# EAGLE board BufferSaver-Panel (EAGLE 9.0.1)
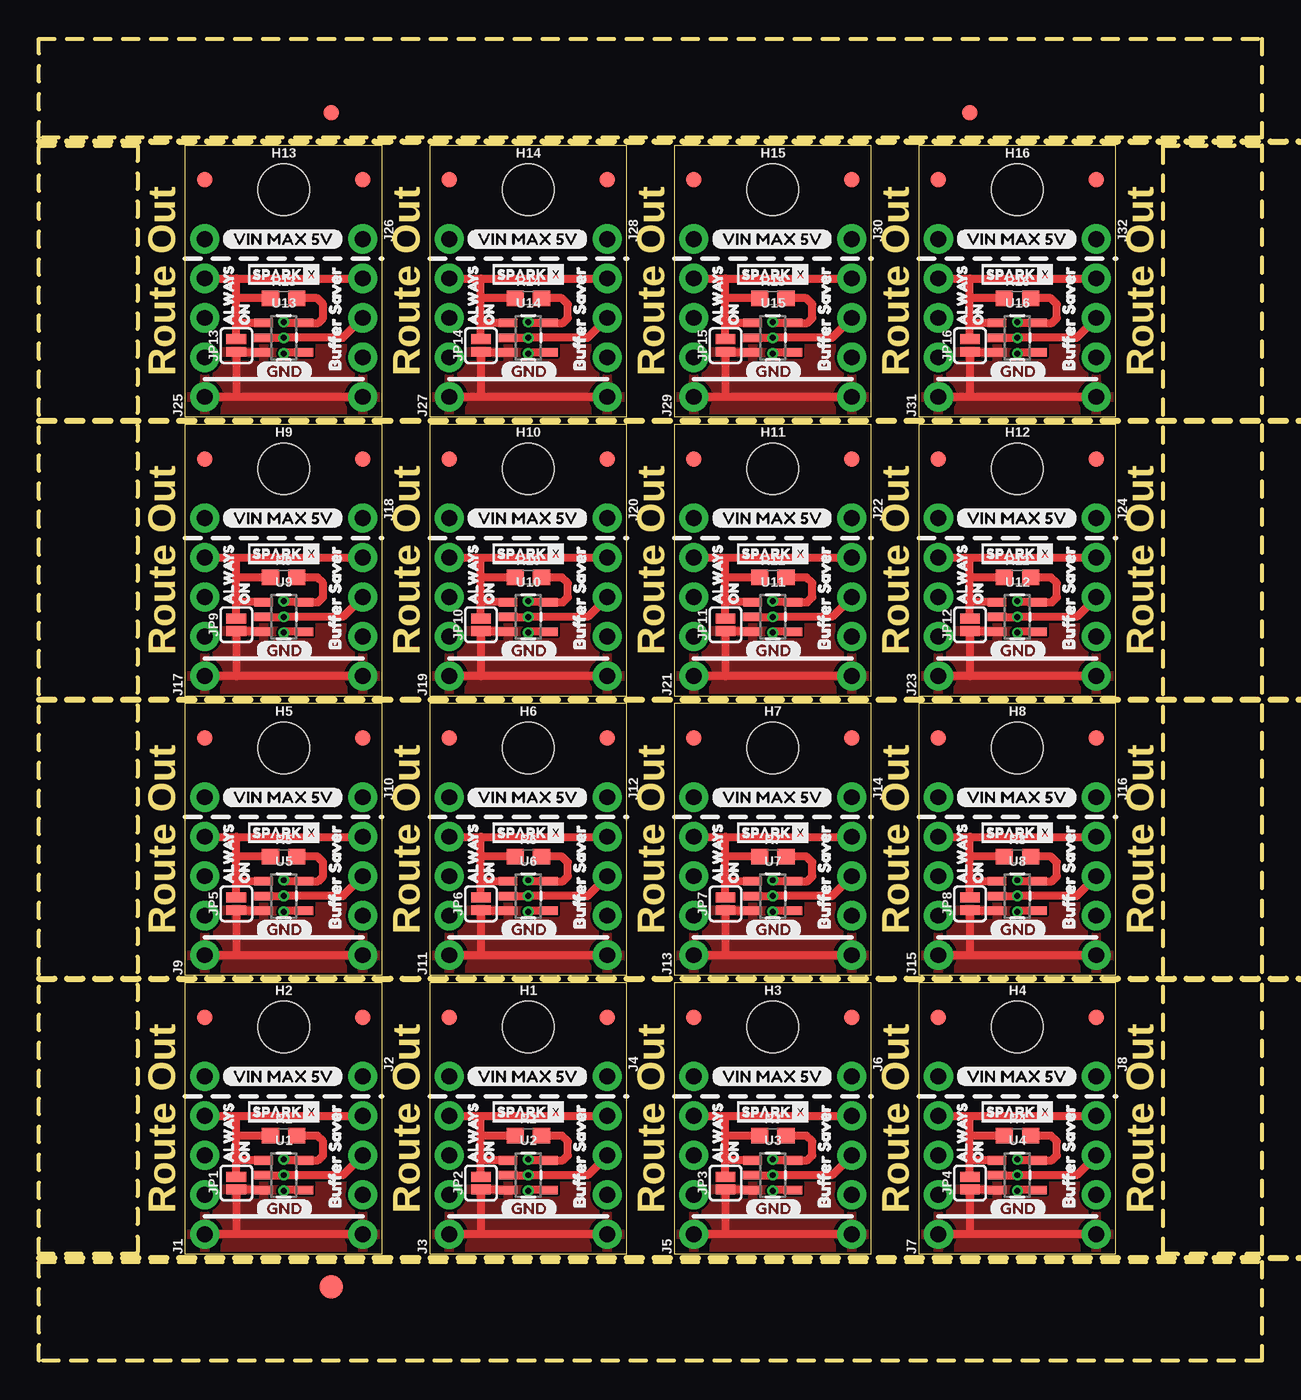
[diagram p0: board, top side]
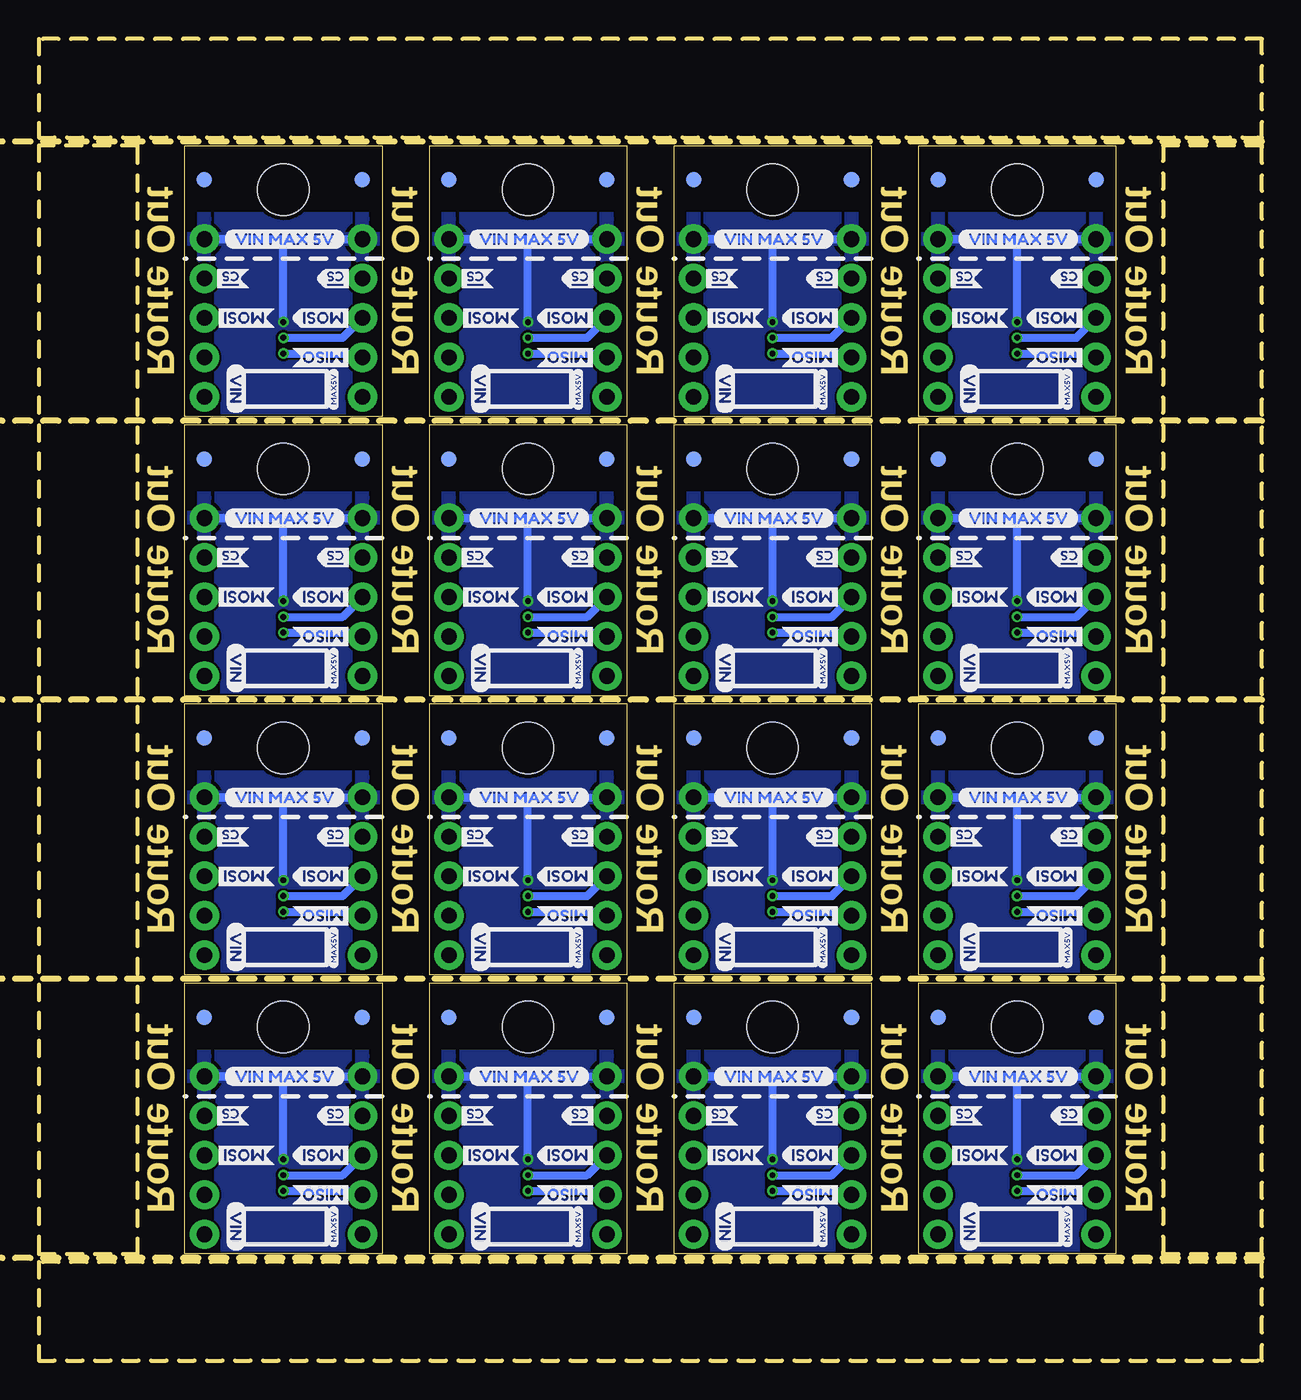
[diagram p1: board, bottom side, seen from below]

Size 78.66 x 85.04 mm. Coordinates in mm from the lower left corner, seen from the top.
Outline: 9.4,6.86 22.08,6.86 22.08,24.31 9.4,24.31 9.4,6.86
Outline: 25.13,6.86 37.81,6.86 37.81,24.31 25.13,24.31 25.13,6.86
Outline: 40.85,6.86 53.53,6.86 53.53,24.31 40.85,24.31 40.85,6.86
Outline: 56.58,6.86 69.26,6.86 69.26,24.31 56.58,24.31 56.58,6.86
Outline: 9.4,24.82 22.08,24.82 22.08,42.27 9.4,42.27 9.4,24.82
Outline: 25.13,24.82 37.81,24.82 37.81,42.27 25.13,42.27 25.13,24.82
Outline: 40.85,24.82 53.53,24.82 53.53,42.27 40.85,42.27 40.85,24.82
Outline: 56.58,24.82 69.26,24.82 69.26,42.27 56.58,42.27 56.58,24.82
Outline: 9.4,42.77 22.08,42.77 22.08,60.22 9.4,60.22 9.4,42.77
Outline: 25.13,42.77 37.81,42.77 37.81,60.22 25.13,60.22 25.13,42.77
Outline: 40.85,42.77 53.53,42.77 53.53,60.22 40.85,60.22 40.85,42.77
Outline: 56.58,42.77 69.26,42.77 69.26,60.22 56.58,60.22 56.58,42.77
Outline: 9.4,60.73 22.08,60.73 22.08,78.18 9.4,78.18 9.4,60.73
Outline: 25.13,60.73 37.81,60.73 37.81,78.18 25.13,78.18 25.13,60.73
Outline: 40.85,60.73 53.53,60.73 53.53,78.18 40.85,78.18 40.85,60.73
Outline: 56.58,60.73 69.26,60.73 69.26,78.18 56.58,78.18 56.58,60.73
Outline: 0,6.35 78.66,6.35 78.66,0 0,0 0,6.35
Outline: 72.31,78.18 78.66,78.18 78.66,6.86 72.31,6.86 72.31,78.18
Outline: 0,85.04 78.66,85.04 78.66,78.69 0,78.69 0,85.04
Outline: 0,78.18 6.35,78.18 6.35,6.86 0,6.86 0,78.18
Copper layers (1*16): Top 0.035mm / dielectric 1.5mm / Bottom 0.035mm
Design rules "SparkFun-2-layer-PCBWay-LIMIT": minimum track width 6mil, minimum drill 0.3mm, track to track 6mil, track to pad 6mil, pad to pad 6mil, via to via 6mil, smd to smd 6mil, copper to edge 6mil, drill to drill 6mil, minimum pad ring 6mil, minimum via ring 6mil, stop-mask expansion 4mil, vias tented up to drill 25mil, thermal gap 10mil
Milling: 240 lines

## Footprints (pad centres in the part's own frame; a part is rotated, then mirrored left to right if it is on the bottom)
FIDUCIAL-1X2 = smd 1 x 1: 1 0,0
FIDUCIAL-1.5X3 = smd 1.5 x 1.5: 1 0,0
STAND-OFF = hole 3.302: 0,0
1X05_NO_SILK = drill 1.016 pad 1.88: 1 0,0; 2 2.54,0; 3 5.08,0; 4 7.62,0; 5 10.16,0
SMT-JUMPER_2_NO_SILK = smd 0.635 x 1.27: 1 -0.406,0; 2 0.406,0
0603 = smd 1.1 x 1: 1 -0.85,0; 2 0.85,0
SOT23-5 = smd 0.55 x 1.2: 1 -0.95,-1.3; 2 0,-1.3; 3 0.95,-1.3; 4 0.95,1.3; 5 -0.95,1.3

## Placement (x,y rotation side)
E$1  [FIDUCIAL-1X2]  18.8,80.28 0 top
E$2  [FIDUCIAL-1X2]  59.86,80.28 0 top
E$3  [FIDUCIAL-1.5X3]  18.8,4.76 0 top
FD1  FIDUCIAL1X2  [FIDUCIAL-1X2]  10.67,22.1 0 top
FD2  FIDUCIAL1X2  [FIDUCIAL-1X2]  20.83,22.1 0 top
FD3  FIDUCIAL1X2  [FIDUCIAL-1X2]  10.67,22.1 0 bottom
FD4  FIDUCIAL1X2  [FIDUCIAL-1X2]  20.83,22.1 0 bottom
FD5  FIDUCIAL1X2  [FIDUCIAL-1X2]  26.4,22.1 0 top
FD6  FIDUCIAL1X2  [FIDUCIAL-1X2]  36.56,22.1 0 top
FD7  FIDUCIAL1X2  [FIDUCIAL-1X2]  26.4,22.1 0 bottom
FD8  FIDUCIAL1X2  [FIDUCIAL-1X2]  36.56,22.1 0 bottom
FD9  FIDUCIAL1X2  [FIDUCIAL-1X2]  42.12,22.1 0 top
FD10  FIDUCIAL1X2  [FIDUCIAL-1X2]  52.28,22.1 0 top
FD11  FIDUCIAL1X2  [FIDUCIAL-1X2]  42.12,22.1 0 bottom
FD12  FIDUCIAL1X2  [FIDUCIAL-1X2]  52.28,22.1 0 bottom
FD13  FIDUCIAL1X2  [FIDUCIAL-1X2]  57.85,22.1 0 top
FD14  FIDUCIAL1X2  [FIDUCIAL-1X2]  68.01,22.1 0 top
FD15  FIDUCIAL1X2  [FIDUCIAL-1X2]  57.85,22.1 0 bottom
FD16  FIDUCIAL1X2  [FIDUCIAL-1X2]  68.01,22.1 0 bottom
FD17  FIDUCIAL1X2  [FIDUCIAL-1X2]  10.67,40.06 0 top
FD18  FIDUCIAL1X2  [FIDUCIAL-1X2]  20.83,40.06 0 top
FD19  FIDUCIAL1X2  [FIDUCIAL-1X2]  10.67,40.06 0 bottom
FD20  FIDUCIAL1X2  [FIDUCIAL-1X2]  20.83,40.06 0 bottom
FD21  FIDUCIAL1X2  [FIDUCIAL-1X2]  26.4,40.06 0 top
FD22  FIDUCIAL1X2  [FIDUCIAL-1X2]  36.56,40.06 0 top
FD23  FIDUCIAL1X2  [FIDUCIAL-1X2]  26.4,40.06 0 bottom
FD24  FIDUCIAL1X2  [FIDUCIAL-1X2]  36.56,40.06 0 bottom
FD25  FIDUCIAL1X2  [FIDUCIAL-1X2]  42.12,40.06 0 top
FD26  FIDUCIAL1X2  [FIDUCIAL-1X2]  52.28,40.06 0 top
FD27  FIDUCIAL1X2  [FIDUCIAL-1X2]  42.12,40.06 0 bottom
FD28  FIDUCIAL1X2  [FIDUCIAL-1X2]  52.28,40.06 0 bottom
FD29  FIDUCIAL1X2  [FIDUCIAL-1X2]  57.85,40.06 0 top
FD30  FIDUCIAL1X2  [FIDUCIAL-1X2]  68.01,40.06 0 top
FD31  FIDUCIAL1X2  [FIDUCIAL-1X2]  57.85,40.06 0 bottom
FD32  FIDUCIAL1X2  [FIDUCIAL-1X2]  68.01,40.06 0 bottom
FD33  FIDUCIAL1X2  [FIDUCIAL-1X2]  10.67,58.01 0 top
FD34  FIDUCIAL1X2  [FIDUCIAL-1X2]  20.83,58.01 0 top
FD35  FIDUCIAL1X2  [FIDUCIAL-1X2]  10.67,58.01 0 bottom
FD36  FIDUCIAL1X2  [FIDUCIAL-1X2]  20.83,58.01 0 bottom
FD37  FIDUCIAL1X2  [FIDUCIAL-1X2]  26.4,58.01 0 top
FD38  FIDUCIAL1X2  [FIDUCIAL-1X2]  36.56,58.01 0 top
FD39  FIDUCIAL1X2  [FIDUCIAL-1X2]  26.4,58.01 0 bottom
FD40  FIDUCIAL1X2  [FIDUCIAL-1X2]  36.56,58.01 0 bottom
FD41  FIDUCIAL1X2  [FIDUCIAL-1X2]  42.12,58.01 0 top
FD42  FIDUCIAL1X2  [FIDUCIAL-1X2]  52.28,58.01 0 top
FD43  FIDUCIAL1X2  [FIDUCIAL-1X2]  42.12,58.01 0 bottom
FD44  FIDUCIAL1X2  [FIDUCIAL-1X2]  52.28,58.01 0 bottom
FD45  FIDUCIAL1X2  [FIDUCIAL-1X2]  57.85,58.01 0 top
FD46  FIDUCIAL1X2  [FIDUCIAL-1X2]  68.01,58.01 0 top
FD47  FIDUCIAL1X2  [FIDUCIAL-1X2]  57.85,58.01 0 bottom
FD48  FIDUCIAL1X2  [FIDUCIAL-1X2]  68.01,58.01 0 bottom
FD49  FIDUCIAL1X2  [FIDUCIAL-1X2]  10.67,75.97 0 top
FD50  FIDUCIAL1X2  [FIDUCIAL-1X2]  20.83,75.97 0 top
FD51  FIDUCIAL1X2  [FIDUCIAL-1X2]  10.67,75.97 0 bottom
FD52  FIDUCIAL1X2  [FIDUCIAL-1X2]  20.83,75.97 0 bottom
FD53  FIDUCIAL1X2  [FIDUCIAL-1X2]  26.4,75.97 0 top
FD54  FIDUCIAL1X2  [FIDUCIAL-1X2]  36.56,75.97 0 top
FD55  FIDUCIAL1X2  [FIDUCIAL-1X2]  26.4,75.97 0 bottom
FD56  FIDUCIAL1X2  [FIDUCIAL-1X2]  36.56,75.97 0 bottom
FD57  FIDUCIAL1X2  [FIDUCIAL-1X2]  42.12,75.97 0 top
FD58  FIDUCIAL1X2  [FIDUCIAL-1X2]  52.28,75.97 0 top
FD59  FIDUCIAL1X2  [FIDUCIAL-1X2]  42.12,75.97 0 bottom
FD60  FIDUCIAL1X2  [FIDUCIAL-1X2]  52.28,75.97 0 bottom
FD61  FIDUCIAL1X2  [FIDUCIAL-1X2]  57.85,75.97 0 top
FD62  FIDUCIAL1X2  [FIDUCIAL-1X2]  68.01,75.97 0 top
FD63  FIDUCIAL1X2  [FIDUCIAL-1X2]  57.85,75.97 0 bottom
FD64  FIDUCIAL1X2  [FIDUCIAL-1X2]  68.01,75.97 0 bottom
H1  STAND-OFF  [STAND-OFF]  31.48,21.46 0 top
H2  STAND-OFF  [STAND-OFF]  15.75,21.46 0 top
H3  STAND-OFF  [STAND-OFF]  47.2,21.46 0 top
H4  STAND-OFF  [STAND-OFF]  62.93,21.46 0 top
H5  STAND-OFF  [STAND-OFF]  15.75,39.42 0 top
H6  STAND-OFF  [STAND-OFF]  31.48,39.42 0 top
H7  STAND-OFF  [STAND-OFF]  47.2,39.42 0 top
H8  STAND-OFF  [STAND-OFF]  62.93,39.42 0 top
H9  STAND-OFF  [STAND-OFF]  15.75,57.38 0 top
H10  STAND-OFF  [STAND-OFF]  31.48,57.38 0 top
H11  STAND-OFF  [STAND-OFF]  47.2,57.38 0 top
H12  STAND-OFF  [STAND-OFF]  62.93,57.38 0 top
H13  STAND-OFF  [STAND-OFF]  15.75,75.34 0 top
H14  STAND-OFF  [STAND-OFF]  31.48,75.34 0 top
H15  STAND-OFF  [STAND-OFF]  47.2,75.34 0 top
H16  STAND-OFF  [STAND-OFF]  62.93,75.34 0 top
J1  [1X05_NO_SILK]  10.67,8.13 90 top
J2  [1X05_NO_SILK]  20.83,18.29 270 top
J3  [1X05_NO_SILK]  26.4,8.13 90 top
J4  [1X05_NO_SILK]  36.56,18.29 270 top
J5  [1X05_NO_SILK]  42.12,8.13 90 top
J6  [1X05_NO_SILK]  52.28,18.29 270 top
J7  [1X05_NO_SILK]  57.85,8.13 90 top
J8  [1X05_NO_SILK]  68.01,18.29 270 top
J9  [1X05_NO_SILK]  10.67,26.09 90 top
J10  [1X05_NO_SILK]  20.83,36.25 270 top
J11  [1X05_NO_SILK]  26.4,26.09 90 top
J12  [1X05_NO_SILK]  36.56,36.25 270 top
J13  [1X05_NO_SILK]  42.12,26.09 90 top
J14  [1X05_NO_SILK]  52.28,36.25 270 top
J15  [1X05_NO_SILK]  57.85,26.09 90 top
J16  [1X05_NO_SILK]  68.01,36.25 270 top
J17  [1X05_NO_SILK]  10.67,44.04 90 top
J18  [1X05_NO_SILK]  20.83,54.2 270 top
J19  [1X05_NO_SILK]  26.4,44.04 90 top
J20  [1X05_NO_SILK]  36.56,54.2 270 top
J21  [1X05_NO_SILK]  42.12,44.04 90 top
J22  [1X05_NO_SILK]  52.28,54.2 270 top
J23  [1X05_NO_SILK]  57.85,44.04 90 top
J24  [1X05_NO_SILK]  68.01,54.2 270 top
J25  [1X05_NO_SILK]  10.67,62 90 top
J26  [1X05_NO_SILK]  20.83,72.16 270 top
J27  [1X05_NO_SILK]  26.4,62 90 top
J28  [1X05_NO_SILK]  36.56,72.16 270 top
J29  [1X05_NO_SILK]  42.12,62 90 top
J30  [1X05_NO_SILK]  52.28,72.16 270 top
J31  [1X05_NO_SILK]  57.85,62 90 top
J32  [1X05_NO_SILK]  68.01,72.16 270 top
JP1  JUMPER-SMT_2_NO_SILK  [SMT-JUMPER_2_NO_SILK]  12.7,11.43 90 top
JP2  JUMPER-SMT_2_NO_SILK  [SMT-JUMPER_2_NO_SILK]  28.43,11.43 90 top
JP3  JUMPER-SMT_2_NO_SILK  [SMT-JUMPER_2_NO_SILK]  44.16,11.43 90 top
JP4  JUMPER-SMT_2_NO_SILK  [SMT-JUMPER_2_NO_SILK]  59.88,11.43 90 top
JP5  JUMPER-SMT_2_NO_SILK  [SMT-JUMPER_2_NO_SILK]  12.7,29.39 90 top
JP6  JUMPER-SMT_2_NO_SILK  [SMT-JUMPER_2_NO_SILK]  28.43,29.39 90 top
JP7  JUMPER-SMT_2_NO_SILK  [SMT-JUMPER_2_NO_SILK]  44.16,29.39 90 top
JP8  JUMPER-SMT_2_NO_SILK  [SMT-JUMPER_2_NO_SILK]  59.88,29.39 90 top
JP9  JUMPER-SMT_2_NO_SILK  [SMT-JUMPER_2_NO_SILK]  12.7,47.35 90 top
JP10  JUMPER-SMT_2_NO_SILK  [SMT-JUMPER_2_NO_SILK]  28.43,47.35 90 top
JP11  JUMPER-SMT_2_NO_SILK  [SMT-JUMPER_2_NO_SILK]  44.16,47.35 90 top
JP12  JUMPER-SMT_2_NO_SILK  [SMT-JUMPER_2_NO_SILK]  59.88,47.35 90 top
JP13  JUMPER-SMT_2_NO_SILK  [SMT-JUMPER_2_NO_SILK]  12.7,65.3 90 top
JP14  JUMPER-SMT_2_NO_SILK  [SMT-JUMPER_2_NO_SILK]  28.43,65.3 90 top
JP15  JUMPER-SMT_2_NO_SILK  [SMT-JUMPER_2_NO_SILK]  44.16,65.3 90 top
JP16  JUMPER-SMT_2_NO_SILK  [SMT-JUMPER_2_NO_SILK]  59.88,65.3 90 top
R1  10k  [0603]  15.75,14.48 0 top
R2  10k  [0603]  31.48,14.48 0 top
R3  10k  [0603]  47.2,14.48 0 top
R4  10k  [0603]  62.93,14.48 0 top
R5  10k  [0603]  15.75,32.44 0 top
R6  10k  [0603]  31.48,32.44 0 top
R7  10k  [0603]  47.2,32.44 0 top
R8  10k  [0603]  62.93,32.44 0 top
R9  10k  [0603]  15.75,50.39 0 top
R10  10k  [0603]  31.48,50.39 0 top
R11  10k  [0603]  47.2,50.39 0 top
R12  10k  [0603]  62.93,50.39 0 top
R13  10k  [0603]  15.75,68.35 0 top
R14  10k  [0603]  31.48,68.35 0 top
R15  10k  [0603]  47.2,68.35 0 top
R16  10k  [0603]  62.93,68.35 0 top
U1  SN74AHC1G125  [SOT23-5]  15.75,11.94 270 top
U2  SN74AHC1G125  [SOT23-5]  31.48,11.94 270 top
U3  SN74AHC1G125  [SOT23-5]  47.2,11.94 270 top
U4  SN74AHC1G125  [SOT23-5]  62.93,11.94 270 top
U5  SN74AHC1G125  [SOT23-5]  15.75,29.9 270 top
U6  SN74AHC1G125  [SOT23-5]  31.48,29.9 270 top
U7  SN74AHC1G125  [SOT23-5]  47.2,29.9 270 top
U8  SN74AHC1G125  [SOT23-5]  62.93,29.9 270 top
U9  SN74AHC1G125  [SOT23-5]  15.75,47.85 270 top
U10  SN74AHC1G125  [SOT23-5]  31.48,47.85 270 top
U11  SN74AHC1G125  [SOT23-5]  47.2,47.85 270 top
U12  SN74AHC1G125  [SOT23-5]  62.93,47.85 270 top
U13  SN74AHC1G125  [SOT23-5]  15.75,65.81 270 top
U14  SN74AHC1G125  [SOT23-5]  31.48,65.81 270 top
U15  SN74AHC1G125  [SOT23-5]  47.2,65.81 270 top
U16  SN74AHC1G125  [SOT23-5]  62.93,65.81 270 top
U$1  [#CS3]  11.05,15.75 180 bottom
U$2  [#CS4]  17.78,15.75 180 bottom
U$3  [VIN_MAX_5V11]  19.56,18.29 0 bottom
U$4  [BUFFER_SAVER7]  19.05,9.14 90 top
U$5  [GND5]  13.97,9.78 0 top
U$6  [MISO2]  11.18,10.67 180 bottom
U$7  [MAX5V8]  12.52,7.29 90 bottom
U$8  [MOSI0]  11.18,13.21 180 bottom
U$9  [#CS3]  26.78,15.75 180 bottom
U$10  [MOSI1]  16.26,13.21 180 bottom
U$11  [ALWAYS9]  12.19,12.19 90 top
U$12  [VIN6]  18.8,10.29 270 bottom
U$13  [ON10]  13.21,12.19 90 top
U$14  [VIN_MAX_5V11]  11.81,18.29 0 top
U$15  [GND5]  29.7,9.78 0 top
U$16  [MISO2]  26.9,10.67 180 bottom
U$17  [MOSI1]  31.98,13.21 180 bottom
U$18  [VIN6]  34.52,10.29 270 bottom
U$19  [MOSI0]  26.9,13.21 180 bottom
U$20  [#CS4]  33.51,15.75 180 bottom
U$21  SPARKX-LOGO2  [SPARKX-TINY]  31.48,16 0 top
U$22  [BUFFER_SAVER7]  34.78,9.14 90 top
U$23  [MAX5V8]  28.25,7.29 90 bottom
U$24  [ALWAYS9]  27.92,12.19 90 top
U$25  [ON10]  28.94,12.19 90 top
U$26  [VIN_MAX_5V11]  27.54,18.29 0 top
U$27  [VIN_MAX_5V11]  35.29,18.29 0 bottom
U$28  [#CS3]  42.5,15.75 180 bottom
U$29  [GND5]  45.43,9.78 0 top
U$30  [MISO2]  42.63,10.67 180 bottom
U$31  [MOSI1]  47.71,13.21 180 bottom
U$32  [VIN6]  50.25,10.29 270 bottom
U$33  [MOSI0]  42.63,13.21 180 bottom
U$34  SPARKX-LOGO2  [SPARKX-TINY]  15.75,16 0 top
U$35  [#CS4]  49.24,15.75 180 bottom
U$36  SPARKX-LOGO2  [SPARKX-TINY]  47.2,16 0 top
U$37  [BUFFER_SAVER7]  50.51,9.14 90 top
U$38  [MAX5V8]  43.98,7.29 90 bottom
U$39  [ALWAYS9]  43.65,12.19 90 top
U$40  [ON10]  44.66,12.19 90 top
U$41  [VIN_MAX_5V11]  43.27,18.29 0 top
U$42  [VIN_MAX_5V11]  51.01,18.29 0 bottom
U$43  [#CS3]  58.23,15.75 180 bottom
U$44  [GND5]  61.15,9.78 0 top
U$45  [MISO2]  58.36,10.67 180 bottom
U$46  [MOSI1]  63.44,13.21 180 bottom
U$47  [VIN6]  65.98,10.29 270 bottom
U$48  [MOSI0]  58.36,13.21 180 bottom
U$49  [#CS4]  64.96,15.75 180 bottom
U$50  SPARKX-LOGO2  [SPARKX-TINY]  62.93,16 0 top
U$51  [BUFFER_SAVER7]  66.23,9.14 90 top
U$52  [MAX5V8]  59.71,7.29 90 bottom
U$53  [ALWAYS9]  59.38,12.19 90 top
U$54  [ON10]  60.39,12.19 90 top
U$55  [VIN_MAX_5V11]  59,18.29 0 top
U$56  [VIN_MAX_5V11]  66.74,18.29 0 bottom
U$57  [#CS3]  11.05,33.71 180 bottom
U$58  [GND5]  13.97,27.74 0 top
U$59  [MISO2]  11.18,28.63 180 bottom
U$60  [MOSI1]  16.26,31.17 180 bottom
U$61  [VIN6]  18.8,28.25 270 bottom
U$62  [MOSI0]  11.18,31.17 180 bottom
U$63  [#CS4]  17.78,33.71 180 bottom
U$64  SPARKX-LOGO2  [SPARKX-TINY]  15.75,33.96 0 top
U$65  [BUFFER_SAVER7]  19.05,27.1 90 top
U$66  [MAX5V8]  12.52,25.25 90 bottom
U$67  [ALWAYS9]  12.19,30.15 90 top
U$68  [ON10]  13.21,30.15 90 top
U$69  [VIN_MAX_5V11]  11.81,36.25 0 top
U$70  [VIN_MAX_5V11]  19.56,36.25 0 bottom
U$71  [#CS3]  26.78,33.71 180 bottom
U$72  [GND5]  29.7,27.74 0 top
U$73  [MISO2]  26.9,28.63 180 bottom
U$74  [MOSI1]  31.98,31.17 180 bottom
U$75  [VIN6]  34.52,28.25 270 bottom
U$76  [MOSI0]  26.9,31.17 180 bottom
U$77  [#CS4]  33.51,33.71 180 bottom
U$78  SPARKX-LOGO2  [SPARKX-TINY]  31.48,33.96 0 top
U$79  [BUFFER_SAVER7]  34.78,27.1 90 top
U$80  [MAX5V8]  28.25,25.25 90 bottom
U$81  [ALWAYS9]  27.92,30.15 90 top
U$82  [ON10]  28.94,30.15 90 top
U$83  [VIN_MAX_5V11]  27.54,36.25 0 top
U$84  [VIN_MAX_5V11]  35.29,36.25 0 bottom
U$85  [#CS3]  42.5,33.71 180 bottom
U$86  [GND5]  45.43,27.74 0 top
U$87  [MISO2]  42.63,28.63 180 bottom
U$88  [MOSI1]  47.71,31.17 180 bottom
U$89  [VIN6]  50.25,28.25 270 bottom
U$90  [MOSI0]  42.63,31.17 180 bottom
U$91  [#CS4]  49.24,33.71 180 bottom
U$92  SPARKX-LOGO2  [SPARKX-TINY]  47.2,33.96 0 top
U$93  [BUFFER_SAVER7]  50.51,27.1 90 top
U$94  [MAX5V8]  43.98,25.25 90 bottom
U$95  [ALWAYS9]  43.65,30.15 90 top
U$96  [ON10]  44.66,30.15 90 top
U$97  [VIN_MAX_5V11]  43.27,36.25 0 top
U$98  [VIN_MAX_5V11]  51.01,36.25 0 bottom
U$99  [#CS3]  58.23,33.71 180 bottom
U$100  [GND5]  61.15,27.74 0 top
U$101  [MISO2]  58.36,28.63 180 bottom
U$102  [MOSI1]  63.44,31.17 180 bottom
U$103  [VIN6]  65.98,28.25 270 bottom
U$104  [MOSI0]  58.36,31.17 180 bottom
U$105  [#CS4]  64.96,33.71 180 bottom
U$106  SPARKX-LOGO2  [SPARKX-TINY]  62.93,33.96 0 top
U$107  [BUFFER_SAVER7]  66.23,27.1 90 top
U$108  [MAX5V8]  59.71,25.25 90 bottom
U$109  [ALWAYS9]  59.38,30.15 90 top
U$110  [ON10]  60.39,30.15 90 top
U$111  [VIN_MAX_5V11]  59,36.25 0 top
U$112  [VIN_MAX_5V11]  66.74,36.25 0 bottom
U$113  [#CS3]  11.05,51.66 180 bottom
U$114  [GND5]  13.97,45.7 0 top
U$115  [MISO2]  11.18,46.58 180 bottom
U$116  [MOSI1]  16.26,49.12 180 bottom
U$117  [VIN6]  18.8,46.2 270 bottom
U$118  [MOSI0]  11.18,49.12 180 bottom
U$119  [#CS4]  17.78,51.66 180 bottom
U$120  SPARKX-LOGO2  [SPARKX-TINY]  15.75,51.92 0 top
U$121  [BUFFER_SAVER7]  19.05,45.06 90 top
U$122  [MAX5V8]  12.52,43.21 90 bottom
U$123  [ALWAYS9]  12.19,48.11 90 top
U$124  [ON10]  13.21,48.11 90 top
U$125  [VIN_MAX_5V11]  11.81,54.2 0 top
U$126  [VIN_MAX_5V11]  19.56,54.2 0 bottom
U$127  [#CS3]  26.78,51.66 180 bottom
U$128  [GND5]  29.7,45.7 0 top
U$129  [MISO2]  26.9,46.58 180 bottom
U$130  [MOSI1]  31.98,49.12 180 bottom
U$131  [VIN6]  34.52,46.2 270 bottom
U$132  [MOSI0]  26.9,49.12 180 bottom
U$133  [#CS4]  33.51,51.66 180 bottom
U$134  SPARKX-LOGO2  [SPARKX-TINY]  31.48,51.92 0 top
U$135  [BUFFER_SAVER7]  34.78,45.06 90 top
U$136  [MAX5V8]  28.25,43.21 90 bottom
U$137  [ALWAYS9]  27.92,48.11 90 top
U$138  [ON10]  28.94,48.11 90 top
U$139  [VIN_MAX_5V11]  27.54,54.2 0 top
U$140  [VIN_MAX_5V11]  35.29,54.2 0 bottom
U$141  [#CS3]  42.5,51.66 180 bottom
U$142  [GND5]  45.43,45.7 0 top
U$143  [MISO2]  42.63,46.58 180 bottom
U$144  [MOSI1]  47.71,49.12 180 bottom
U$145  [VIN6]  50.25,46.2 270 bottom
U$146  [MOSI0]  42.63,49.12 180 bottom
U$147  [#CS4]  49.24,51.66 180 bottom
U$148  SPARKX-LOGO2  [SPARKX-TINY]  47.2,51.92 0 top
U$149  [BUFFER_SAVER7]  50.51,45.06 90 top
U$150  [MAX5V8]  43.98,43.21 90 bottom
U$151  [ALWAYS9]  43.65,48.11 90 top
U$152  [ON10]  44.66,48.11 90 top
U$153  [VIN_MAX_5V11]  43.27,54.2 0 top
U$154  [VIN_MAX_5V11]  51.01,54.2 0 bottom
U$155  [#CS3]  58.23,51.66 180 bottom
U$156  [GND5]  61.15,45.7 0 top
U$157  [MISO2]  58.36,46.58 180 bottom
U$158  [MOSI1]  63.44,49.12 180 bottom
U$159  [VIN6]  65.98,46.2 270 bottom
U$160  [MOSI0]  58.36,49.12 180 bottom
U$161  [#CS4]  64.96,51.66 180 bottom
U$162  SPARKX-LOGO2  [SPARKX-TINY]  62.93,51.92 0 top
U$163  [BUFFER_SAVER7]  66.23,45.06 90 top
U$164  [MAX5V8]  59.71,43.21 90 bottom
U$165  [ALWAYS9]  59.38,48.11 90 top
U$166  [ON10]  60.39,48.11 90 top
U$167  [VIN_MAX_5V11]  59,54.2 0 top
U$168  [VIN_MAX_5V11]  66.74,54.2 0 bottom
U$169  [#CS3]  11.05,69.62 180 bottom
U$170  [GND5]  13.97,63.65 0 top
U$171  [MISO2]  11.18,64.54 180 bottom
U$172  [MOSI1]  16.26,67.08 180 bottom
U$173  [VIN6]  18.8,64.16 270 bottom
U$174  [MOSI0]  11.18,67.08 180 bottom
U$175  [#CS4]  17.78,69.62 180 bottom
U$176  SPARKX-LOGO2  [SPARKX-TINY]  15.75,69.88 0 top
U$177  [BUFFER_SAVER7]  19.05,63.02 90 top
U$178  [MAX5V8]  12.52,61.16 90 bottom
U$179  [ALWAYS9]  12.19,66.07 90 top
U$180  [ON10]  13.21,66.07 90 top
U$181  [VIN_MAX_5V11]  11.81,72.16 0 top
U$182  [VIN_MAX_5V11]  19.56,72.16 0 bottom
U$183  [#CS3]  26.78,69.62 180 bottom
U$184  [GND5]  29.7,63.65 0 top
U$185  [MISO2]  26.9,64.54 180 bottom
U$186  [MOSI1]  31.98,67.08 180 bottom
U$187  [VIN6]  34.52,64.16 270 bottom
U$188  [MOSI0]  26.9,67.08 180 bottom
U$189  [#CS4]  33.51,69.62 180 bottom
U$190  SPARKX-LOGO2  [SPARKX-TINY]  31.48,69.88 0 top
U$191  [BUFFER_SAVER7]  34.78,63.02 90 top
U$192  [MAX5V8]  28.25,61.16 90 bottom
U$193  [ALWAYS9]  27.92,66.07 90 top
U$194  [ON10]  28.94,66.07 90 top
U$195  [VIN_MAX_5V11]  27.54,72.16 0 top
U$196  [VIN_MAX_5V11]  35.29,72.16 0 bottom
U$197  [#CS3]  42.5,69.62 180 bottom
U$198  [GND5]  45.43,63.65 0 top
U$199  [MISO2]  42.63,64.54 180 bottom
U$200  [MOSI1]  47.71,67.08 180 bottom
U$201  [VIN6]  50.25,64.16 270 bottom
U$202  [MOSI0]  42.63,67.08 180 bottom
U$203  [#CS4]  49.24,69.62 180 bottom
U$204  SPARKX-LOGO2  [SPARKX-TINY]  47.2,69.88 0 top
U$205  [BUFFER_SAVER7]  50.51,63.02 90 top
U$206  [MAX5V8]  43.98,61.16 90 bottom
U$207  [ALWAYS9]  43.65,66.07 90 top
U$208  [ON10]  44.66,66.07 90 top
U$209  [VIN_MAX_5V11]  43.27,72.16 0 top
U$210  [VIN_MAX_5V11]  51.01,72.16 0 bottom
U$211  [#CS3]  58.23,69.62 180 bottom
U$212  [GND5]  61.15,63.65 0 top
U$213  [MISO2]  58.36,64.54 180 bottom
U$214  [MOSI1]  63.44,67.08 180 bottom
U$215  [VIN6]  65.98,64.16 270 bottom
U$216  [MOSI0]  58.36,67.08 180 bottom
U$217  [#CS4]  64.96,69.62 180 bottom
U$218  SPARKX-LOGO2  [SPARKX-TINY]  62.93,69.88 0 top
U$219  [BUFFER_SAVER7]  66.23,63.02 90 top
U$220  [MAX5V8]  59.71,61.16 90 bottom
U$221  [ALWAYS9]  59.38,66.07 90 top
U$222  [ON10]  60.39,66.07 90 top
U$223  [VIN_MAX_5V11]  59,72.16 0 top
U$224  [VIN_MAX_5V11]  66.74,72.16 0 bottom

## Library data of the parts
E$1 E$2 FD1-FD64 = SparkFun-Aesthetics
E$3 = SparkFun-Retired
H1-H16 = SparkFun-Hardware
J1-J32 = SparkFun-Connectors
JP1-JP16 = SparkFun-Jumpers
R1-R16 = SparkFun-Resistors; PROD_ID: RES-00824
U1-U16 = SparkFun-IC-Logic; PROD_ID: IC-11920
U$1-U$20 U$22-U$33 U$35 U$37-U$49 U$51-U$63 U$65-U$77 U$79-U$91 U$93-U$105 U$107-U$119 U$121-U$133 U$135-U$147 U$149-U$161 U$163-U$175 U$177-U$189 U$191-U$203 U$205-U$217 U$219-U$224 = buzzard_labels
U$21 U$34 U$36 U$50 U$64 U$78 U$92 U$106 U$120 U$134 U$148 U$162 U$176 U$190 U$204 U$218 = SparkX

## Nets
5V: J1.5 J2.1 R1.2 U1.5
5V1: J3.5 J4.1 R2.2 U2.5
5V2: J5.5 J6.1 R3.2 U3.5
5V3: J7.5 J8.1 R4.2 U4.5
5V4: J9.5 J10.1 R5.2 U5.5
5V5: J11.5 J12.1 R6.2 U6.5
5V6: J13.5 J14.1 R7.2 U7.5
5V7: J15.5 J16.1 R8.2 U8.5
5V8: J17.5 J18.1 R9.2 U9.5
5V9: J19.5 J20.1 R10.2 U10.5
5V10: J21.5 J22.1 R11.2 U11.5
5V11: J23.5 J24.1 R12.2 U12.5
5V12: J25.5 J26.1 R13.2 U13.5
5V13: J27.5 J28.1 R14.2 U14.5
5V14: J29.5 J30.1 R15.2 U15.5
5V15: J31.5 J32.1 R16.2 U16.5
!CS: J1.4 J2.2 JP1.2 R1.1 U1.1
!CS1: J3.4 J4.2 JP2.2 R2.1 U2.1
!CS2: J5.4 J6.2 JP3.2 R3.1 U3.1
!CS3: J7.4 J8.2 JP4.2 R4.1 U4.1
!CS4: J9.4 J10.2 JP5.2 R5.1 U5.1
!CS5: J11.4 J12.2 JP6.2 R6.1 U6.1
!CS6: J13.4 J14.2 JP7.2 R7.1 U7.1
!CS7: J15.4 J16.2 JP8.2 R8.1 U8.1
!CS8: J17.4 J18.2 JP9.2 R9.1 U9.1
!CS9: J19.4 J20.2 JP10.2 R10.1 U10.1
!CS10: J21.4 J22.2 JP11.2 R11.1 U11.1
!CS11: J23.4 J24.2 JP12.2 R12.1 U12.1
!CS12: J25.4 J26.2 JP13.2 R13.1 U13.1
!CS13: J27.4 J28.2 JP14.2 R14.1 U14.1
!CS14: J29.4 J30.2 JP15.2 R15.1 U15.1
!CS15: J31.4 J32.2 JP16.2 R16.1 U16.1
GND: J1.1 J2.5 JP1.1 U1.3
GND1: J3.1 J4.5 JP2.1 U2.3
GND2: J5.1 J6.5 JP3.1 U3.3
GND3: J7.1 J8.5 JP4.1 U4.3
GND4: J9.1 J10.5 JP5.1 U5.3
GND5: J11.1 J12.5 JP6.1 U6.3
GND6: J13.1 J14.5 JP7.1 U7.3
GND7: J15.1 J16.5 JP8.1 U8.3
GND8: J17.1 J18.5 JP9.1 U9.3
GND9: J19.1 J20.5 JP10.1 U10.3
GND10: J21.1 J22.5 JP11.1 U11.3
GND11: J23.1 J24.5 JP12.1 U12.3
GND12: J25.1 J26.5 JP13.1 U13.3
GND13: J27.1 J28.5 JP14.1 U14.3
GND14: J29.1 J30.5 JP15.1 U15.3
GND15: J31.1 J32.5 JP16.1 U16.3
MISO: J1.2 U1.4
MISO1: J3.2 U2.4
MISO2: J5.2 U3.4
MISO3: J7.2 U4.4
MISO4: J9.2 U5.4
MISO5: J11.2 U6.4
MISO6: J13.2 U7.4
MISO7: J15.2 U8.4
MISO8: J17.2 U9.4
MISO9: J19.2 U10.4
MISO10: J21.2 U11.4
MISO11: J23.2 U12.4
MISO12: J25.2 U13.4
MISO13: J27.2 U14.4
MISO14: J29.2 U15.4
MISO15: J31.2 U16.4
MOSI: J1.3 J2.3 U1.2
MOSI1: J3.3 J4.3 U2.2
MOSI2: J5.3 J6.3 U3.2
MOSI3: J7.3 J8.3 U4.2
MOSI4: J9.3 J10.3 U5.2
MOSI5: J11.3 J12.3 U6.2
MOSI6: J13.3 J14.3 U7.2
MOSI7: J15.3 J16.3 U8.2
MOSI8: J17.3 J18.3 U9.2
MOSI9: J19.3 J20.3 U10.2
MOSI10: J21.3 J22.3 U11.2
MOSI11: J23.3 J24.3 U12.2
MOSI12: J25.3 J26.3 U13.2
MOSI13: J27.3 J28.3 U14.2
MOSI14: J29.3 J30.3 U15.2
MOSI15: J31.3 J32.3 U16.2

## Tracks (layer width: path | path; a pad name or v marks a point on that pad's centre or on a via)
5V  (via drill 0.38)
  Top 0.508: v15.75,12.95 15.81,12.89 U1.5 17.97,12.89 18.29,13.21 18.29,14.1 17.91,14.48 R1.2
  Bottom 0.508: 19.56,18.29 J2.1 15.75,18.29 | v15.75,12.95 15.75,18.29 | 15.75,18.29 J1.5
  pour Bottom: 9.4,19.56 22.1,19.56 22.1,6.86 9.4,6.86
5V1  (via drill 0.38)
  Top 0.508: v31.48,12.95 31.54,12.89 U2.5 33.7,12.89 34.02,13.21 34.02,14.1 33.63,14.48 R2.2
  Bottom 0.508: 35.29,18.29 J4.1 31.48,18.29 | v31.48,12.95 31.48,18.29 | 31.48,18.29 J3.5
  pour Bottom: 25.13,19.56 37.83,19.56 37.83,6.86 25.13,6.86
5V2  (via drill 0.38)
  Top 0.508: v47.2,12.95 47.27,12.89 U3.5 49.42,12.89 49.74,13.21 49.74,14.1 49.36,14.48 R3.2
  Bottom 0.508: 51.01,18.29 J6.1 47.2,18.29 | v47.2,12.95 47.2,18.29 | 47.2,18.29 J5.5
  pour Bottom: 40.85,19.56 53.55,19.56 53.55,6.86 40.85,6.86
5V3  (via drill 0.38)
  Top 0.508: v62.93,12.95 63,12.89 U4.5 65.15,12.89 65.47,13.21 65.47,14.1 65.09,14.48 R4.2
  Bottom 0.508: 66.74,18.29 J8.1 62.93,18.29 | v62.93,12.95 62.93,18.29 | 62.93,18.29 J7.5
  pour Bottom: 56.58,19.56 69.28,19.56 69.28,6.86 56.58,6.86
5V4  (via drill 0.38)
  Top 0.508: v15.75,30.91 15.81,30.85 U5.5 17.97,30.85 18.29,31.17 18.29,32.05 17.91,32.44 R5.2
  Bottom 0.508: 19.56,36.25 J10.1 15.75,36.25 | v15.75,30.91 15.75,36.25 | 15.75,36.25 J9.5
  pour Bottom: 9.4,37.52 22.1,37.52 22.1,24.82 9.4,24.82
5V5  (via drill 0.38)
  Top 0.508: v31.48,30.91 31.54,30.85 U6.5 33.7,30.85 34.02,31.17 34.02,32.05 33.63,32.44 R6.2
  Bottom 0.508: 35.29,36.25 J12.1 31.48,36.25 | v31.48,30.91 31.48,36.25 | 31.48,36.25 J11.5
  pour Bottom: 25.13,37.52 37.83,37.52 37.83,24.82 25.13,24.82
5V6  (via drill 0.38)
  Top 0.508: v47.2,30.91 47.27,30.85 U7.5 49.42,30.85 49.74,31.17 49.74,32.05 49.36,32.44 R7.2
  Bottom 0.508: 51.01,36.25 J14.1 47.2,36.25 | v47.2,30.91 47.2,36.25 | 47.2,36.25 J13.5
  pour Bottom: 40.85,37.52 53.55,37.52 53.55,24.82 40.85,24.82
5V7  (via drill 0.38)
  Top 0.508: v62.93,30.91 63,30.85 U8.5 65.15,30.85 65.47,31.17 65.47,32.05 65.09,32.44 R8.2
  Bottom 0.508: 66.74,36.25 J16.1 62.93,36.25 | v62.93,30.91 62.93,36.25 | 62.93,36.25 J15.5
  pour Bottom: 56.58,37.52 69.28,37.52 69.28,24.82 56.58,24.82
5V8  (via drill 0.38)
  Top 0.508: v15.75,48.87 15.81,48.8 U9.5 17.97,48.8 18.29,49.12 18.29,50.01 17.91,50.39 R9.2
  Bottom 0.508: 19.56,54.2 J18.1 15.75,54.2 | v15.75,48.87 15.75,54.2 | 15.75,54.2 J17.5
  pour Bottom: 9.4,55.47 22.1,55.47 22.1,42.77 9.4,42.77
5V9  (via drill 0.38)
  Top 0.508: v31.48,48.87 31.54,48.8 U10.5 33.7,48.8 34.02,49.12 34.02,50.01 33.63,50.39 R10.2
  Bottom 0.508: 35.29,54.2 J20.1 31.48,54.2 | v31.48,48.87 31.48,54.2 | 31.48,54.2 J19.5
  pour Bottom: 25.13,55.47 37.83,55.47 37.83,42.77 25.13,42.77
5V10  (via drill 0.38)
  Top 0.508: v47.2,48.87 47.27,48.8 U11.5 49.42,48.8 49.74,49.12 49.74,50.01 49.36,50.39 R11.2
  Bottom 0.508: 51.01,54.2 J22.1 47.2,54.2 | v47.2,48.87 47.2,54.2 | 47.2,54.2 J21.5
  pour Bottom: 40.85,55.47 53.55,55.47 53.55,42.77 40.85,42.77
5V11  (via drill 0.38)
  Top 0.508: v62.93,48.87 63,48.8 U12.5 65.15,48.8 65.47,49.12 65.47,50.01 65.09,50.39 R12.2
  Bottom 0.508: 66.74,54.2 J24.1 62.93,54.2 | v62.93,48.87 62.93,54.2 | 62.93,54.2 J23.5
  pour Bottom: 56.58,55.47 69.28,55.47 69.28,42.77 56.58,42.77
5V12  (via drill 0.38)
  Top 0.508: v15.75,66.83 15.81,66.76 U13.5 17.97,66.76 18.29,67.08 18.29,67.97 17.91,68.35 R13.2
  Bottom 0.508: 19.56,72.16 J26.1 15.75,72.16 | v15.75,66.83 15.75,72.16 | 15.75,72.16 J25.5
  pour Bottom: 9.4,73.43 22.1,73.43 22.1,60.73 9.4,60.73
5V13  (via drill 0.38)
  Top 0.508: v31.48,66.83 31.54,66.76 U14.5 33.7,66.76 34.02,67.08 34.02,67.97 33.63,68.35 R14.2
  Bottom 0.508: 35.29,72.16 J28.1 31.48,72.16 | v31.48,66.83 31.48,72.16 | 31.48,72.16 J27.5
  pour Bottom: 25.13,73.43 37.83,73.43 37.83,60.73 25.13,60.73
5V14  (via drill 0.38)
  Top 0.508: v47.2,66.83 47.27,66.76 U15.5 49.42,66.76 49.74,67.08 49.74,67.97 49.36,68.35 R15.2
  Bottom 0.508: 51.01,72.16 J30.1 47.2,72.16 | v47.2,66.83 47.2,72.16 | 47.2,72.16 J29.5
  pour Bottom: 40.85,73.43 53.55,73.43 53.55,60.73 40.85,60.73
5V15  (via drill 0.38)
  Top 0.508: v62.93,66.83 63,66.76 U16.5 65.15,66.76 65.47,67.08 65.47,67.97 65.09,68.35 R16.2
  Bottom 0.508: 66.74,72.16 J32.1 62.93,72.16 | v62.93,66.83 62.93,72.16 | 62.93,72.16 J31.5
  pour Bottom: 56.58,73.43 69.28,73.43 69.28,60.73 56.58,60.73
!CS
  Top 0.508: J1.4 12.7,15.75 | 12.7,15.75 J2.2 | JP1.2 12.7,12.83 | 12.7,12.83 12.7,14.48 | 12.7,14.48 12.7,15.75 | U1.1 12.76,12.89 12.7,12.83 | R1.1 12.7,14.48
!CS1
  Top 0.508: J3.4 28.43,15.75 | 28.43,15.75 J4.2 | JP2.2 28.43,12.83 | 28.43,12.83 28.43,14.48 | 28.43,14.48 28.43,15.75 | U2.1 28.49,12.89 28.43,12.83 | R2.1 28.43,14.48
!CS2
  Top 0.508: J5.4 44.16,15.75 | 44.16,15.75 J6.2 | JP3.2 44.16,12.83 | 44.16,12.83 44.16,14.48 | 44.16,14.48 44.16,15.75 | U3.1 44.22,12.89 44.16,12.83 | R3.1 44.16,14.48
!CS3
  Top 0.508: J7.4 59.88,15.75 | 59.88,15.75 J8.2 | JP4.2 59.88,12.83 | 59.88,12.83 59.88,14.48 | 59.88,14.48 59.88,15.75 | U4.1 59.94,12.89 59.88,12.83 | R4.1 59.88,14.48
!CS4
  Top 0.508: J9.4 12.7,33.71 | 12.7,33.71 J10.2 | JP5.2 12.7,30.79 | 12.7,30.79 12.7,32.44 | 12.7,32.44 12.7,33.71 | U5.1 12.76,30.85 12.7,30.79 | R5.1 12.7,32.44
!CS5
  Top 0.508: J11.4 28.43,33.71 | 28.43,33.71 J12.2 | JP6.2 28.43,30.79 | 28.43,30.79 28.43,32.44 | 28.43,32.44 28.43,33.71 | U6.1 28.49,30.85 28.43,30.79 | R6.1 28.43,32.44
!CS6
  Top 0.508: J13.4 44.16,33.71 | 44.16,33.71 J14.2 | JP7.2 44.16,30.79 | 44.16,30.79 44.16,32.44 | 44.16,32.44 44.16,33.71 | U7.1 44.22,30.85 44.16,30.79 | R7.1 44.16,32.44
!CS7
  Top 0.508: J15.4 59.88,33.71 | 59.88,33.71 J16.2 | JP8.2 59.88,30.79 | 59.88,30.79 59.88,32.44 | 59.88,32.44 59.88,33.71 | U8.1 59.94,30.85 59.88,30.79 | R8.1 59.88,32.44
!CS8
  Top 0.508: J17.4 12.7,51.66 | 12.7,51.66 J18.2 | JP9.2 12.7,48.74 | 12.7,48.74 12.7,50.39 | 12.7,50.39 12.7,51.66 | U9.1 12.76,48.8 12.7,48.74 | R9.1 12.7,50.39
!CS9
  Top 0.508: J19.4 28.43,51.66 | 28.43,51.66 J20.2 | JP10.2 28.43,48.74 | 28.43,48.74 28.43,50.39 | 28.43,50.39 28.43,51.66 | U10.1 28.49,48.8 28.43,48.74 | R10.1 28.43,50.39
!CS10
  Top 0.508: J21.4 44.16,51.66 | 44.16,51.66 J22.2 | JP11.2 44.16,48.74 | 44.16,48.74 44.16,50.39 | 44.16,50.39 44.16,51.66 | U11.1 44.22,48.8 44.16,48.74 | R11.1 44.16,50.39
!CS11
  Top 0.508: J23.4 59.88,51.66 | 59.88,51.66 J24.2 | JP12.2 59.88,48.74 | 59.88,48.74 59.88,50.39 | 59.88,50.39 59.88,51.66 | U12.1 59.94,48.8 59.88,48.74 | R12.1 59.88,50.39
!CS12
  Top 0.508: J25.4 12.7,69.62 | 12.7,69.62 J26.2 | JP13.2 12.7,66.7 | 12.7,66.7 12.7,68.35 | 12.7,68.35 12.7,69.62 | U13.1 12.76,66.76 12.7,66.7 | R13.1 12.7,68.35
!CS13
  Top 0.508: J27.4 28.43,69.62 | 28.43,69.62 J28.2 | JP14.2 28.43,66.7 | 28.43,66.7 28.43,68.35 | 28.43,68.35 28.43,69.62 | U14.1 28.49,66.76 28.43,66.7 | R14.1 28.43,68.35
!CS14
  Top 0.508: J29.4 44.16,69.62 | 44.16,69.62 J30.2 | JP15.2 44.16,66.7 | 44.16,66.7 44.16,68.35 | 44.16,68.35 44.16,69.62 | U15.1 44.22,66.76 44.16,66.7 | R15.1 44.16,68.35
!CS15
  Top 0.508: J31.4 59.88,69.62 | 59.88,69.62 J32.2 | JP16.2 59.88,66.7 | 59.88,66.7 59.88,68.35 | 59.88,68.35 59.88,69.62 | U16.1 59.94,66.76 59.88,66.7 | R16.1 59.88,68.35
GND
  Top 0.508: J2.5 12.7,8.13 | 12.7,8.13 J1.1 | JP1.1 12.7,10.92 | 12.7,10.92 12.7,8.13 | U1.3 12.77,10.99 12.7,10.92
  pour Top: 9.4,19.56 22.1,19.56 22.1,6.86 9.4,6.86
GND1
  Top 0.508: J4.5 28.43,8.13 | 28.43,8.13 J3.1 | JP2.1 28.43,10.92 | 28.43,10.92 28.43,8.13 | U2.3 28.49,10.99 28.43,10.92
  pour Top: 25.13,19.56 37.83,19.56 37.83,6.86 25.13,6.86
GND2
  Top 0.508: J6.5 44.16,8.13 | 44.16,8.13 J5.1 | JP3.1 44.16,10.92 | 44.16,10.92 44.16,8.13 | U3.3 44.22,10.99 44.16,10.92
  pour Top: 40.85,19.56 53.55,19.56 53.55,6.86 40.85,6.86
GND3
  Top 0.508: J8.5 59.88,8.13 | 59.88,8.13 J7.1 | JP4.1 59.88,10.92 | 59.88,10.92 59.88,8.13 | U4.3 59.95,10.99 59.88,10.92
  pour Top: 56.58,19.56 69.28,19.56 69.28,6.86 56.58,6.86
GND4
  Top 0.508: J10.5 12.7,26.09 | 12.7,26.09 J9.1 | JP5.1 12.7,28.88 | 12.7,28.88 12.7,26.09 | U5.3 12.77,28.95 12.7,28.88
  pour Top: 9.4,37.52 22.1,37.52 22.1,24.82 9.4,24.82
GND5
  Top 0.508: J12.5 28.43,26.09 | 28.43,26.09 J11.1 | JP6.1 28.43,28.88 | 28.43,28.88 28.43,26.09 | U6.3 28.49,28.95 28.43,28.88
  pour Top: 25.13,37.52 37.83,37.52 37.83,24.82 25.13,24.82
GND6
  Top 0.508: J14.5 44.16,26.09 | 44.16,26.09 J13.1 | JP7.1 44.16,28.88 | 44.16,28.88 44.16,26.09 | U7.3 44.22,28.95 44.16,28.88
  pour Top: 40.85,37.52 53.55,37.52 53.55,24.82 40.85,24.82
GND7
  Top 0.508: J16.5 59.88,26.09 | 59.88,26.09 J15.1 | JP8.1 59.88,28.88 | 59.88,28.88 59.88,26.09 | U8.3 59.95,28.95 59.88,28.88
  pour Top: 56.58,37.52 69.28,37.52 69.28,24.82 56.58,24.82
GND8
  Top 0.508: J18.5 12.7,44.04 | 12.7,44.04 J17.1 | JP9.1 12.7,46.84 | 12.7,46.84 12.7,44.04 | U9.3 12.77,46.9 12.7,46.84
  pour Top: 9.4,55.47 22.1,55.47 22.1,42.77 9.4,42.77
GND9
  Top 0.508: J20.5 28.43,44.04 | 28.43,44.04 J19.1 | JP10.1 28.43,46.84 | 28.43,46.84 28.43,44.04 | U10.3 28.49,46.9 28.43,46.84
  pour Top: 25.13,55.47 37.83,55.47 37.83,42.77 25.13,42.77
GND10
  Top 0.508: J22.5 44.16,44.04 | 44.16,44.04 J21.1 | JP11.1 44.16,46.84 | 44.16,46.84 44.16,44.04 | U11.3 44.22,46.9 44.16,46.84
  pour Top: 40.85,55.47 53.55,55.47 53.55,42.77 40.85,42.77
GND11
  Top 0.508: J24.5 59.88,44.04 | 59.88,44.04 J23.1 | JP12.1 59.88,46.84 | 59.88,46.84 59.88,44.04 | U12.3 59.95,46.9 59.88,46.84
  pour Top: 56.58,55.47 69.28,55.47 69.28,42.77 56.58,42.77
GND12
  Top 0.508: J26.5 12.7,62 | 12.7,62 J25.1 | JP13.1 12.7,64.8 | 12.7,64.8 12.7,62 | U13.3 12.77,64.86 12.7,64.8
  pour Top: 9.4,73.43 22.1,73.43 22.1,60.73 9.4,60.73
GND13
  Top 0.508: J28.5 28.43,62 | 28.43,62 J27.1 | JP14.1 28.43,64.8 | 28.43,64.8 28.43,62 | U14.3 28.49,64.86 28.43,64.8
  pour Top: 25.13,73.43 37.83,73.43 37.83,60.73 25.13,60.73
GND14
  Top 0.508: J30.5 44.16,62 | 44.16,62 J29.1 | JP15.1 44.16,64.8 | 44.16,64.8 44.16,62 | U15.3 44.22,64.86 44.16,64.8
  pour Top: 40.85,73.43 53.55,73.43 53.55,60.73 40.85,60.73
GND15
  Top 0.508: J32.5 59.88,62 | 59.88,62 J31.1 | JP16.1 59.88,64.8 | 59.88,64.8 59.88,62 | U16.3 59.95,64.86 59.88,64.8
  pour Top: 56.58,73.43 69.28,73.43 69.28,60.73 56.58,60.73
MISO  (via drill 0.38)
  Top 0.508: U1.4 15.81,10.99 v15.75,10.92
  Bottom 0.508: v15.75,10.92 10.92,10.92 J1.2
MISO1  (via drill 0.38)
  Top 0.508: U2.4 31.54,10.99 v31.48,10.92
  Bottom 0.508: v31.48,10.92 26.65,10.92 J3.2
MISO2  (via drill 0.38)
  Top 0.508: U3.4 47.27,10.99 v47.2,10.92
  Bottom 0.508: v47.2,10.92 42.38,10.92 J5.2
MISO3  (via drill 0.38)
  Top 0.508: U4.4 63,10.99 v62.93,10.92
  Bottom 0.508: v62.93,10.92 58.11,10.92 J7.2
MISO4  (via drill 0.38)
  Top 0.508: U5.4 15.81,28.95 v15.75,28.88
  Bottom 0.508: v15.75,28.88 10.92,28.88 J9.2
MISO5  (via drill 0.38)
  Top 0.508: U6.4 31.54,28.95 v31.48,28.88
  Bottom 0.508: v31.48,28.88 26.65,28.88 J11.2
MISO6  (via drill 0.38)
  Top 0.508: U7.4 47.27,28.95 v47.2,28.88
  Bottom 0.508: v47.2,28.88 42.38,28.88 J13.2
MISO7  (via drill 0.38)
  Top 0.508: U8.4 63,28.95 v62.93,28.88
  Bottom 0.508: v62.93,28.88 58.11,28.88 J15.2
MISO8  (via drill 0.38)
  Top 0.508: U9.4 15.81,46.9 v15.75,46.84
  Bottom 0.508: v15.75,46.84 10.92,46.84 J17.2
MISO9  (via drill 0.38)
  Top 0.508: U10.4 31.54,46.9 v31.48,46.84
  Bottom 0.508: v31.48,46.84 26.65,46.84 J19.2
MISO10  (via drill 0.38)
  Top 0.508: U11.4 47.27,46.9 v47.2,46.84
  Bottom 0.508: v47.2,46.84 42.38,46.84 J21.2
MISO11  (via drill 0.38)
  Top 0.508: U12.4 63,46.9 v62.93,46.84
  Bottom 0.508: v62.93,46.84 58.11,46.84 J23.2
MISO12  (via drill 0.38)
  Top 0.508: U13.4 15.81,64.86 v15.75,64.8
  Bottom 0.508: v15.75,64.8 10.92,64.8 J25.2
MISO13  (via drill 0.38)
  Top 0.508: U14.4 31.54,64.86 v31.48,64.8
  Bottom 0.508: v31.48,64.8 26.65,64.8 J27.2
MISO14  (via drill 0.38)
  Top 0.508: U15.4 47.27,64.86 v47.2,64.8
  Bottom 0.508: v47.2,64.8 42.38,64.8 J29.2
MISO15  (via drill 0.38)
  Top 0.508: U16.4 63,64.86 v62.93,64.8
  Bottom 0.508: v62.93,64.8 58.11,64.8 J31.2
MOSI  (via drill 0.38)
  Top 0.508: J2.3 19.56,11.94 v15.75,11.94 U1.2
  Bottom 0.508: v15.75,11.94 11.94,11.94 J1.3
MOSI1  (via drill 0.38)
  Top 0.508: J4.3 35.29,11.94 v31.48,11.94 U2.2
  Bottom 0.508: v31.48,11.94 27.67,11.94 J3.3
MOSI2  (via drill 0.38)
  Top 0.508: J6.3 51.01,11.94 v47.2,11.94 U3.2
  Bottom 0.508: v47.2,11.94 43.39,11.94 J5.3
MOSI3  (via drill 0.38)
  Top 0.508: J8.3 66.74,11.94 v62.93,11.94 U4.2
  Bottom 0.508: v62.93,11.94 59.12,11.94 J7.3
MOSI4  (via drill 0.38)
  Top 0.508: J10.3 19.56,29.9 v15.75,29.9 U5.2
  Bottom 0.508: v15.75,29.9 11.94,29.9 J9.3
MOSI5  (via drill 0.38)
  Top 0.508: J12.3 35.29,29.9 v31.48,29.9 U6.2
  Bottom 0.508: v31.48,29.9 27.67,29.9 J11.3
MOSI6  (via drill 0.38)
  Top 0.508: J14.3 51.01,29.9 v47.2,29.9 U7.2
  Bottom 0.508: v47.2,29.9 43.39,29.9 J13.3
MOSI7  (via drill 0.38)
  Top 0.508: J16.3 66.74,29.9 v62.93,29.9 U8.2
  Bottom 0.508: v62.93,29.9 59.12,29.9 J15.3
MOSI8  (via drill 0.38)
  Top 0.508: J18.3 19.56,47.85 v15.75,47.85 U9.2
  Bottom 0.508: v15.75,47.85 11.94,47.85 J17.3
MOSI9  (via drill 0.38)
  Top 0.508: J20.3 35.29,47.85 v31.48,47.85 U10.2
  Bottom 0.508: v31.48,47.85 27.67,47.85 J19.3
MOSI10  (via drill 0.38)
  Top 0.508: J22.3 51.01,47.85 v47.2,47.85 U11.2
  Bottom 0.508: v47.2,47.85 43.39,47.85 J21.3
MOSI11  (via drill 0.38)
  Top 0.508: J24.3 66.74,47.85 v62.93,47.85 U12.2
  Bottom 0.508: v62.93,47.85 59.12,47.85 J23.3
MOSI12  (via drill 0.38)
  Top 0.508: J26.3 19.56,65.81 v15.75,65.81 U13.2
  Bottom 0.508: v15.75,65.81 11.94,65.81 J25.3
MOSI13  (via drill 0.38)
  Top 0.508: J28.3 35.29,65.81 v31.48,65.81 U14.2
  Bottom 0.508: v31.48,65.81 27.67,65.81 J27.3
MOSI14  (via drill 0.38)
  Top 0.508: J30.3 51.01,65.81 v47.2,65.81 U15.2
  Bottom 0.508: v47.2,65.81 43.39,65.81 J29.3
MOSI15  (via drill 0.38)
  Top 0.508: J32.3 66.74,65.81 v62.93,65.81 U16.2
  Bottom 0.508: v62.93,65.81 59.12,65.81 J31.3

## Text on the board
Dimension: Route Out | Route Out | Route Out | Route Out | Route Out | Route Out | Route Out | Route Out | Route Out | Route Out | Route Out | Route Out | Route Out | Route Out | Route Out | Route Out | Route Out | Route Out | Route Out | Route Out
Milling: v-score | v-score | v-score | v-score | v-score